# EAGLE board RX BREAKOUT_LHS_2.2 (EAGLE 6.4)
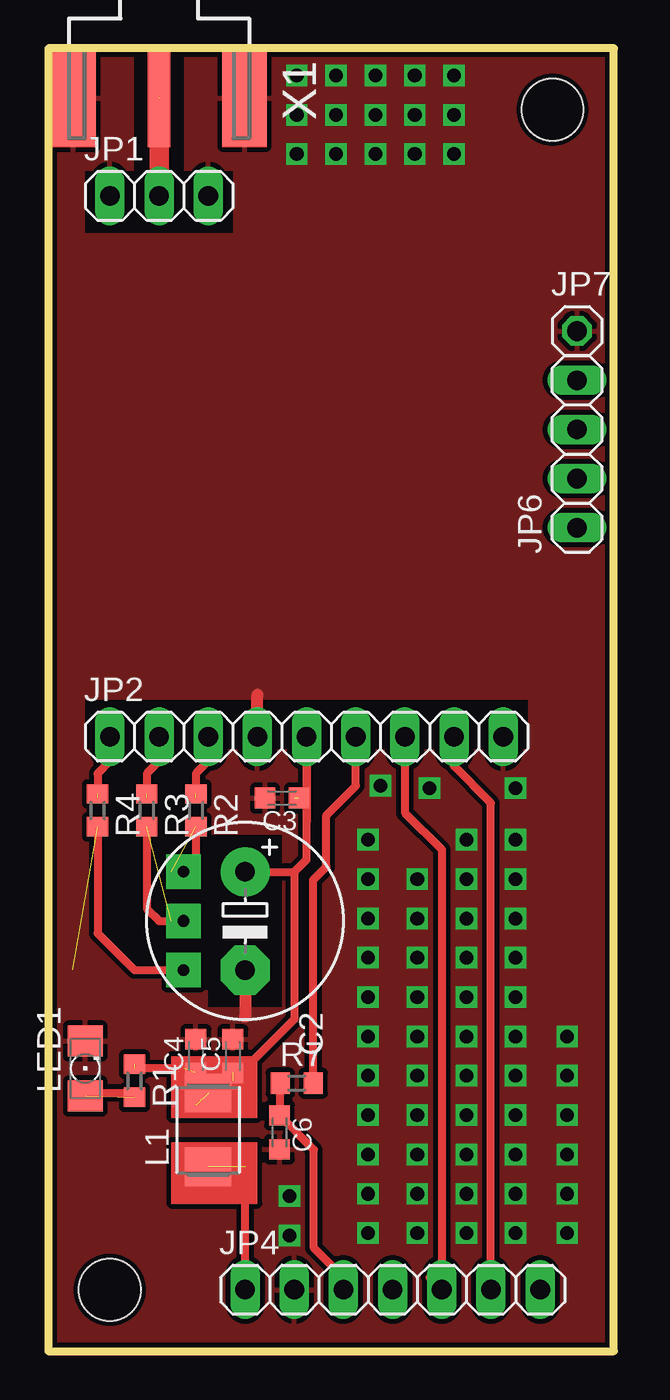
[diagram p0: board, top side]
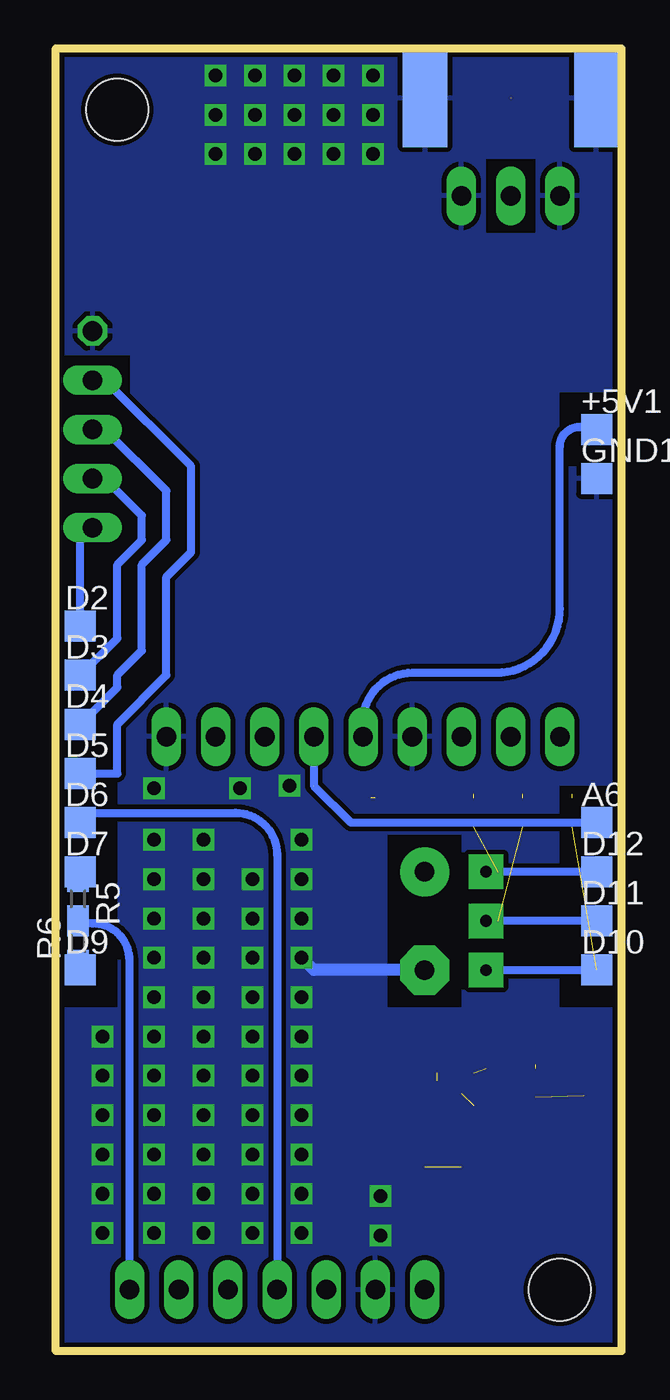
[diagram p1: board, bottom side, seen from below]

Size 29.21 x 67.31 mm. Coordinates in mm from the lower left corner, seen from the top.
Outline: 0,67.31 0,0 29.21,0 29.21,67.31 0,67.31
Copper layers (1*16): Top 0.035mm / dielectric 1.5mm / Bottom 0.035mm
Design rules "default *": minimum track width 10mil, minimum drill 24mil, track to track 10mil, track to pad 10mil, pad to pad 10mil, via to via 10mil, smd to smd 10mil, copper to edge 10mil, drill to drill 10mil, minimum pad ring 10mil, minimum via ring 8mil, stop-mask expansion 4mil, vias tented up to drill 0mil, thermal gap 10mil
Holes 3.2 mm at 26.04,64.13 3.18,3.18
tRestrict: area 1.9,57.8 to 9.5,61; area 1.9,31.1 to 24.8,33.7; area 4.4,57.8 to 7,67.3; area 8.3,17.8 to 12.1,26.7
bRestrict: area 0,17.8 to 3.2,29.2; area 26,17.8 to 29.2,39.4; area 0.6,45.7 to 3.2,49.5; area 25.4,48.9 to 29.2,51.4; area 4.4,57.8 to 7,61.6; area 8.3,17.8 to 12.1,26.7

## Footprints (pad centres in the part's own frame; a part is rotated, then mirrored left to right if it is on the bottom)
TP16SQ = smd 1.6 x 1.6: TP 0,0
E5-10,5 = drill 1.016 pad 2.54: + -2.54,0 | drill 1.016 pad 2.54 octagon: - 2.54,0
C0603K = smd 1.05 x 1.08: 1 -0.875,0; 2 0.875,0
1X03 = drill 1.016 long: 1 -2.54,0; 2 0,0; 3 2.54,0
1X09 = drill 1.016 long: 1 -10.16,0; 2 -7.62,0; 3 -5.08,0; 4 -2.54,0; 5 0,0; 6 2.54,0; 7 5.08,0; 8 7.62,0; 9 10.16,0
1X07 = drill 1.016 long: 1 -7.62,0; 2 -5.08,0; 3 -2.54,0; 4 0,0; 5 2.54,0; 6 5.08,0; 7 7.62,0
1X04 = drill 1.016 long: 1 -3.81,0; 2 -1.27,0; 3 1.27,0; 4 3.81,0
1X01 = drill 1.016 octagon: 1 0,0
L4532M = smd 2 x 2.4: 1 -1.9,0; 2 1.9,0
1206 = smd 1.6 x 1.803: A -1.422,0; C 1.422,0
R0603 = smd 1 x 1.1: 1 -0.85,0; 2 0.85,0
J502-ND-142-0701-881/886 = smd 5.08 x 1.143: 1 2.565,0 | smd 5.08 x 2.286: G@1 2.565,4.42; G@2 2.565,-4.42 | smd 5.08 x 2.286 bottom: G@3 2.565,4.42; G@4 2.565,-4.42

## Placement (x,y rotation side)
+5V1  PTR1TP16SQ  [TP16SQ]  1.27,47.62 0 bottom
A6  PTR1TP16SQ  [TP16SQ]  1.27,27.31 0 bottom
C2  470U  [E5-10,5]  10.16,22.22 270 top
C3  100N  [C0603K]  12.07,28.57 180 top
C4  10N  [C0603K]  7.62,15.24 90 top
C5  1N  [C0603K]  9.53,15.24 90 top
C6  10N  [C0603K]  11.94,11.3 270 top
D2  PTR1TP16SQ  [TP16SQ]  27.94,37.47 0 bottom
D3  PTR1TP16SQ  [TP16SQ]  27.94,34.92 0 bottom
D4  PTR1TP16SQ  [TP16SQ]  27.94,32.39 0 bottom
D5  PTR1TP16SQ  [TP16SQ]  27.94,29.85 0 bottom
D6  PTR1TP16SQ  [TP16SQ]  27.94,27.31 0 bottom
D7  PTR1TP16SQ  [TP16SQ]  27.94,24.77 0 bottom
D9  PTR1TP16SQ  [TP16SQ]  27.94,19.68 0 bottom
D10  PTR1TP16SQ  [TP16SQ]  1.27,19.68 0 bottom
D11  PTR1TP16SQ  [TP16SQ]  1.27,22.22 0 bottom
D12  PTR1TP16SQ  [TP16SQ]  1.27,24.77 0 bottom
GND11  PTR1TP16SQ  [TP16SQ]  1.27,45.08 0 bottom
JP1  [1X03]  5.71,59.69 0 top
JP2  [1X09]  13.34,31.75 0 top
JP4  [1X07]  17.78,3.18 0 top
JP6  [1X04]  27.31,46.36 90 top
JP7  [1X01]  27.31,52.7 0 top
L1  [L4532M]  8.25,11.43 90 top
LED1  [1206]  1.91,14.61 90 top
R1  560R  [R0603]  4.45,13.97 270 top
R2  1k  [R0603]  7.62,27.94 270 top
R3  1k  [R0603]  5.08,27.94 270 top
R4  1k  [R0603]  2.54,27.94 270 top
R5  470R  [R0603]  28.07,23.37 270 bottom
R6  1K  [R0603]  28.07,21.08 90 bottom
R7  47k  [R0603]  12.83,13.84 0 top
X1  SMA-142-0701-881/886  [J502-ND-142-0701-881/886]  5.71,67.31 270 top

## Library data of the parts
+5V1 A6 D2-D7 D9-D12 GND11 = testpad
C2-C6 = rcl
JP1 JP2 JP4 JP6 JP7 = pinhead
L1 R1-R7 = resistor
LED1 = led
X1 = con-coax; MF: JOHNSON COMPONENTS; MPN: 142-0701-881; OC_FARNELL: 1608603; OC_NEWARK: 08B906

## Nets
ATV_OUT: JP4.7 R5.2 R6.2
AUDIO_OUT: JP2.7 JP4.5
BUZZER: D6.TP JP4.4
D7: D7.TP R5.1
D9: D9.TP R6.1
GND: C2.- C3.2 C4.2 C5.2 C6.2 GND11.TP JP1.1 JP1.3 JP2.4 JP2.9 JP4.2 JP7.1 LED1.C X1.G@1 X1.G@2 X1.G@3 X1.G@4
N$1: D12.TP R2.2
N$2: JP2.3 R2.1
N$3: D11.TP R3.2
N$4: LED1.A R1.2
N$5: JP1.2 X1.1
N$7: D10.TP R4.2
N$9: JP2.2 R3.1
N$11: +5V1.TP C2.+ C3.1 C4.1 C5.1 JP2.5 L1.2 R1.1
N$12: JP2.1 R4.1
N$13: D2.TP JP6.1
N$15: D3.TP JP6.2
N$16: D4.TP JP6.3
N$17: D5.TP JP6.4
RSSI: A6.TP JP2.6 R7.2
RSSI_OUT: C6.1 JP4.3 R7.1
V+: JP4.1 L1.1
VID_OUT: JP2.8 JP4.6

## Tracks (layer width: path | path; a pad name or v marks a point on that pad's centre or on a via)
ATV_OUT
  Bottom 0.406: R5.2 R6.2 arc90 27.9,22.1 27.31,22.1 arc90 25.4,20.19 JP4.7
AUDIO_OUT
  Top 0.406: 19.68,3.81 JP4.5 20.32,25.91 18.42,27.81 JP2.7
BUZZER
  Bottom 0.406: JP4.4 17.78,25.65 arc-90 19.94,27.81 27.43,27.81 D6.TP
D7
  Bottom 0.406: D7.TP 28.07,24.38 R5.1
D9
  Bottom 0.406: D9.TP 28.07,19.68 R6.1 | R6.1 28.07,20.32 28.32,20.32 28.32,20.23 | R6.1 28.32,20.23 | 28.32,20.23 28.32,20.07
D10  (via drill 0.6 pad 1.78)
  Top 0.406: 2.54,27.31 2.54,21.59 4.45,19.68 v6.99,19.68
D11  (via drill 0.6 pad 1.78)
  Top 0.406: 5.08,27.31 5.08,22.86 5.71,22.22 v6.99,22.22
D12  (via drill 0.6 pad 1.78)
  Top 0.406: 7.62,27.31 7.62,25.4 v6.99,24.77
GND  (via drill 0.7)
  Top 0.61: JP2.4 10.79,33.91 | C2.- 10.16,17.27
  Bottom 0.61: C2.- 15.88,19.68 v16.51,20.32
  other vias: 16.51,16.26 16.51,14.22 16.51,12.19 16.51,10.16 19.05,10.16 19.05,12.19 19.05,14.22 19.05,16.26 21.59,16.26 21.59,14.22 21.59,12.19 21.59,10.16 21.59,8.13 19.05,8.13 16.51,8.13 16.51,6.1 19.05,6.1 21.59,6.1 24.13,6.1 24.13,8.13 24.13,10.16 24.13,12.19 24.13,14.22 24.13,16.26 26.8,16.26 26.8,14.22 26.8,12.19 26.8,10.16 26.8,8.13 26.8,6.1 16.51,18.29 19.05,18.29 21.59,18.29 24.13,18.29 24.13,20.32 21.59,20.32 19.05,20.32 16.51,22.35 19.05,22.35 21.59,22.35 24.13,22.35 24.13,24.38 24.13,26.42 21.59,24.38 21.59,26.42 19.05,24.38 16.51,24.38 16.51,26.42 17.14,29.21 19.68,29.08 24.13,29.08 12.83,65.91 14.86,65.91 16.89,65.91 18.92,65.91 20.96,65.91 20.96,63.88 18.92,63.88 16.89,63.88 14.86,63.88 12.83,63.88 12.83,61.85 14.86,61.85 16.89,61.85 18.92,61.85 20.96,61.85 12.45,5.97 12.45,8
  pour Bottom: -0.38,-0.38 29.46,-0.38 29.46,67.69 -0.38,67.69
  pour Top: -0.51,-0.76 29.97,-0.76 29.97,67.94 -0.51,67.94
N$1  (1 unrouted)
  Bottom 0.406: D12.TP 6.35,24.77
N$2  (1 unrouted)
  Top 0.406: JP2.3 8.25,30.48 7.62,29.85 7.62,28.57
N$3  (1 unrouted)
  Bottom 0.406: D11.TP 6.35,22.22
N$4  (1 unrouted)
N$5  (1 unrouted)
  Top 1.016: JP1.2 5.71,64.77
N$7  (1 unrouted)
  Bottom 0.406: 6.35,19.68 D10.TP
N$8
  Top 0.406: 1.91,13.34 4.45,13.34
N$9  (1 unrouted)
  Top 0.406: JP2.2 5.71,30.48 5.08,29.85 5.08,28.57
N$11  (5 unrouted)
  Top 0.406: 13.34,28.57 JP2.5 13.34,25.4 12.7,24.77 | 13.34,28.57 13.34,27.31 | 12.7,28.57 13.34,28.57 | C2.+ 12.7,24.77 | 12.7,24.77 12.7,17.14 9.53,13.97 8.89,14.61 6.99,14.61 | 6.99,14.61 7.62,12.7 | 6.99,14.61 4.45,14.61
  Bottom 0.406: JP2.5 13.34,32.51 arc90 10.79,35.05 6.48,35.05 arc-90 3.18,38.35 3.18,46.74 arc90 2.16,47.75 1.4,47.75 arc90 +5V1.TP
N$12  (1 unrouted)
  Top 0.406: JP2.1 3.18,30.48 2.54,29.85 2.54,28.57
N$13
  Bottom 0.406: D2.TP 27.94,42.55 JP6.1
N$15
  Bottom 0.406: D3.TP 26.04,36.83 26.04,40.64 24.77,41.91 24.77,43.18 26.67,45.08 JP6.2
N$16
  Bottom 0.406: D4.TP 26.04,34.29 26.04,34.92 24.77,36.2 24.77,40.64 23.5,41.91 23.5,44.45 26.67,47.62 JP6.3
N$17
  Bottom 0.406: D5.TP 26.04,29.85 26.04,32.39 23.5,34.92 23.5,40 22.23,41.28 22.23,45.72 26.67,50.17 JP6.4
RSSI  (1 unrouted)
  Top 0.406: 13.72,13.8 R7.2 13.68,24.35 14.35,25.02 14.35,27.69 15.88,29.21 15.88,31.88
  Bottom 0.406: JP2.6 15.88,29.21 13.97,27.31 A6.TP
RSSI_OUT
  Top 0.406: R7.1 arc90 11.94,13.8 C6.1 13.72,10.4 13.72,5.33 15.24,3.81 JP4.3
V+  (1 unrouted)
  Top 0.406: JP4.1 10.16,9.53
VID_OUT
  Top 0.406: JP4.6 22.86,28.32 20.96,30.23 JP2.8
(copper drawn outside any net)
  shapes: Top area x4

## Text on the board
_tsilk: 5.8GHZ FPV RX5808-PRO ENABLED BREAKOUT BOARD ( http://code.google.com/p/rx5808-pro/) | FOR DIVERSITY MAIN BOARD | © MIKE DALTON 2015